# Altium PCB PCB1.PcbDoc (part 2 of 2)
Units mm, origin at the board's own origin, x right, y up, seen from the top; angles counter-clockwise.
Board outline 64.18 x 46.75 mm, 2 copper layers (Top Layer, Bottom Layer); 48 components, 57 nets, 248 pads, 92 vias.
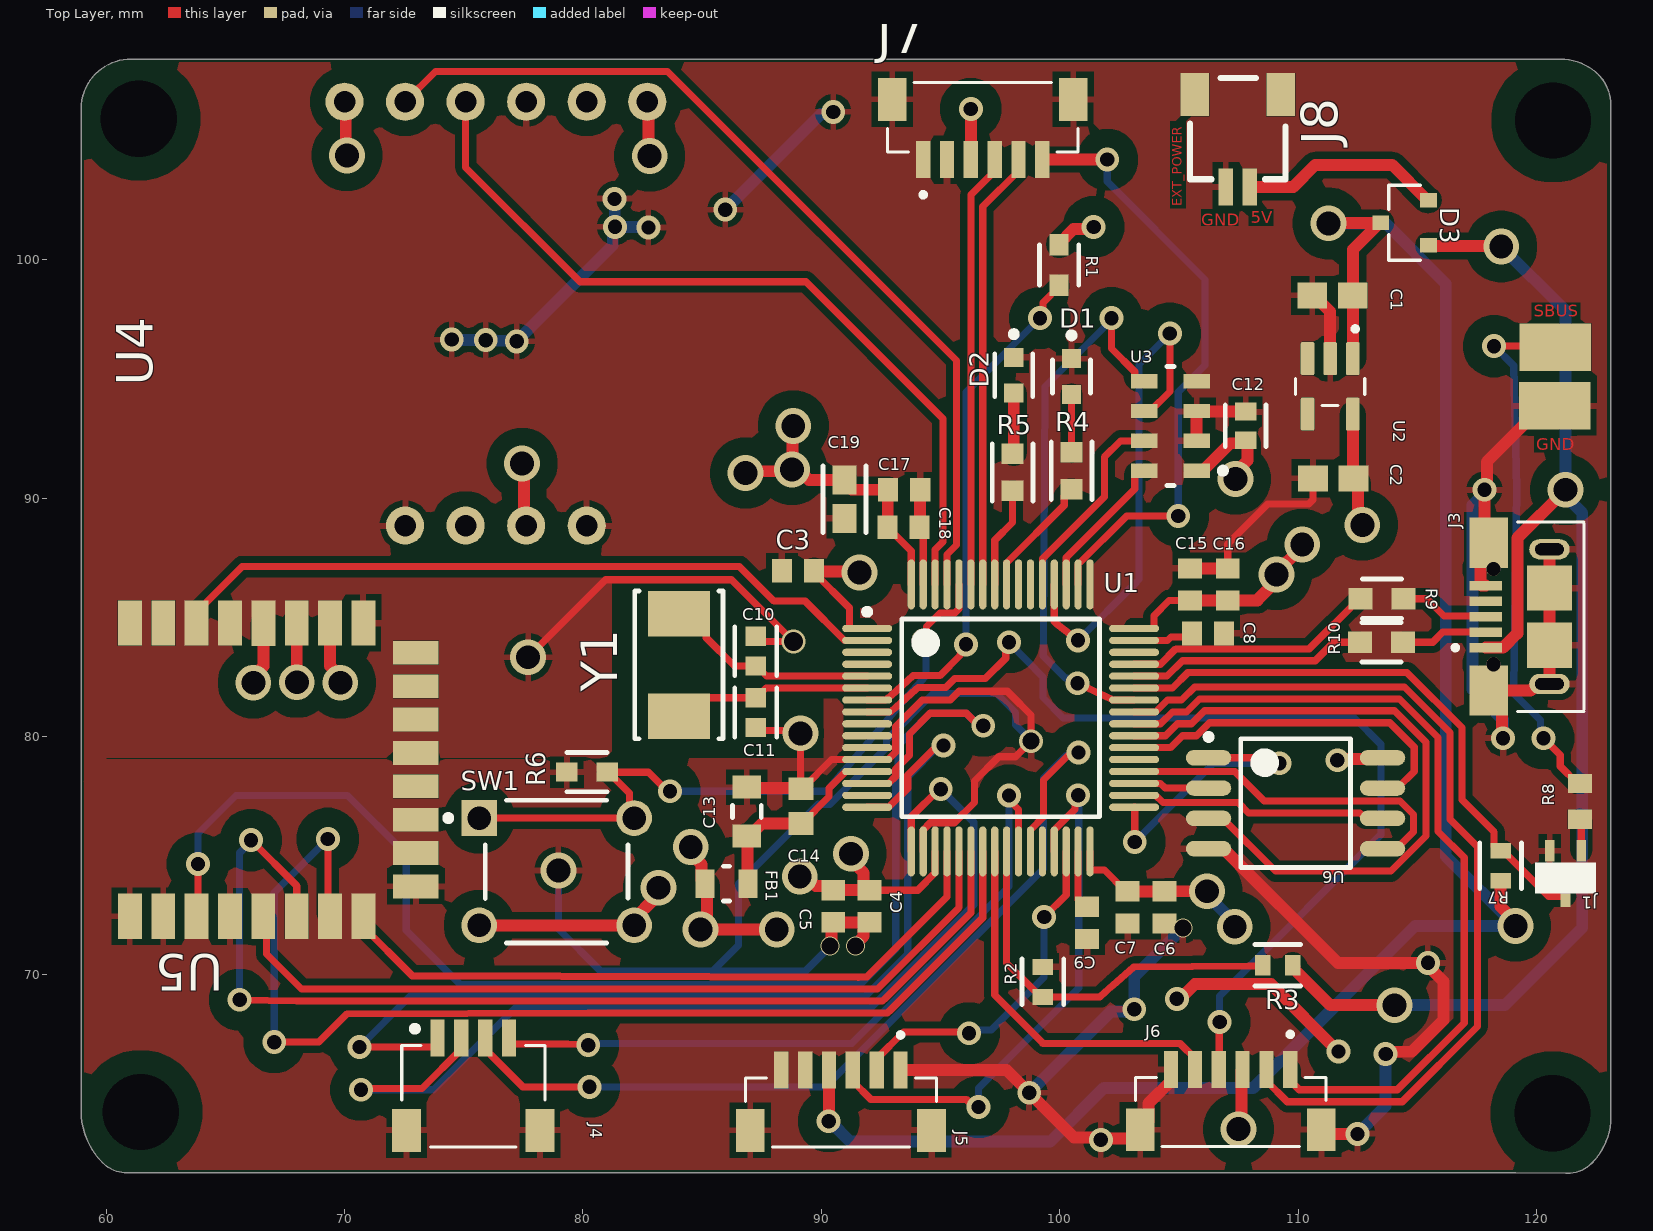
[diagram p0: Top Layer view]

## Silkscreen, mask and mechanical layers (free items; w line width, h text height) (continued)
Mechanical 1: (continued)
  lines w0.254: 119.135,61.694 121.225,61.669 ; 119.149,61.694 119.075,61.694 ; 120.954,106.465 120.954,106.691 ; 122.6,107.767 cw(c121.324,106.491) 123.129,106.491 123.129,106.265 123.129,84.5 123.129,64.034 cw(c120.385,64.034) 122.325,62.094 cw(c121.299,63.12) 121.299,61.669 121.225,61.669 ; 122.631,107.744 ccw(c121.01,106.124) 121.01,108.416 119.196,108.417 118.949,108.417 66.496,108.417 ; 58.946,106.337 ccw(c58.946,106.337) 58.946,106.337 ; 58.946,106.337 ccw(c58.946,106.337) 58.946,106.337 ; 58.946,106.337 cw(c61.012,106.337) 59.551,107.797 cw(c61.048,106.3) 61.048,108.417 66.496,108.417 ; 58.946,106.337 58.946,64.294 58.946,64.289 ccw(c62.012,64.289) 59.844,62.121 ccw(c60.875,63.151) 60.875,61.694 61.207,61.694 61.246,61.694 118.746,61.694 119.075,61.694 ; 66.496,108.417 ccw(c66.496,108.417) 66.496,108.417 ; 119.075,61.694 ccw(c119.075,61.694) 119.075,61.694 ; 121.225,61.669 ccw(c121.225,61.669) 121.225,61.669 ; 120.954,64.234 ccw(c120.954,64.234) 120.954,64.234